# Altium PCB I2C-Sensor-PCB.pcbdoc
Units mil, origin at the board's own origin, x right, y up, seen from the top; angles counter-clockwise.
Board outline 1140 x 940 mil, 2 copper layers (Top Layer, Bottom Layer), stack 62.2 mil thick; 10 components, 5 nets, 29 pads, 6 vias.
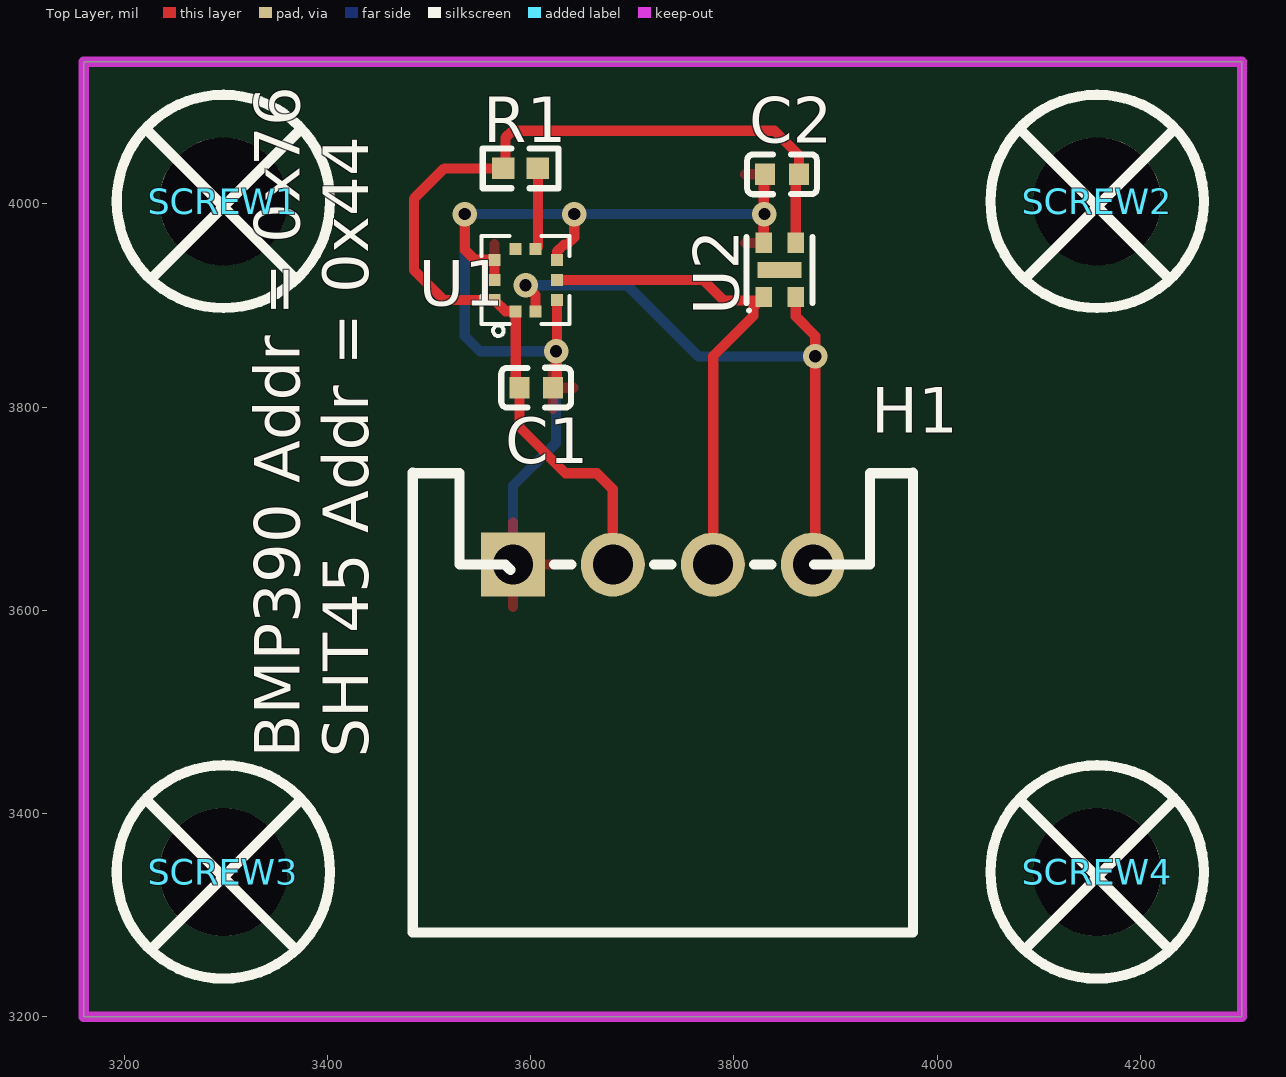
[diagram p0: Top Layer view]
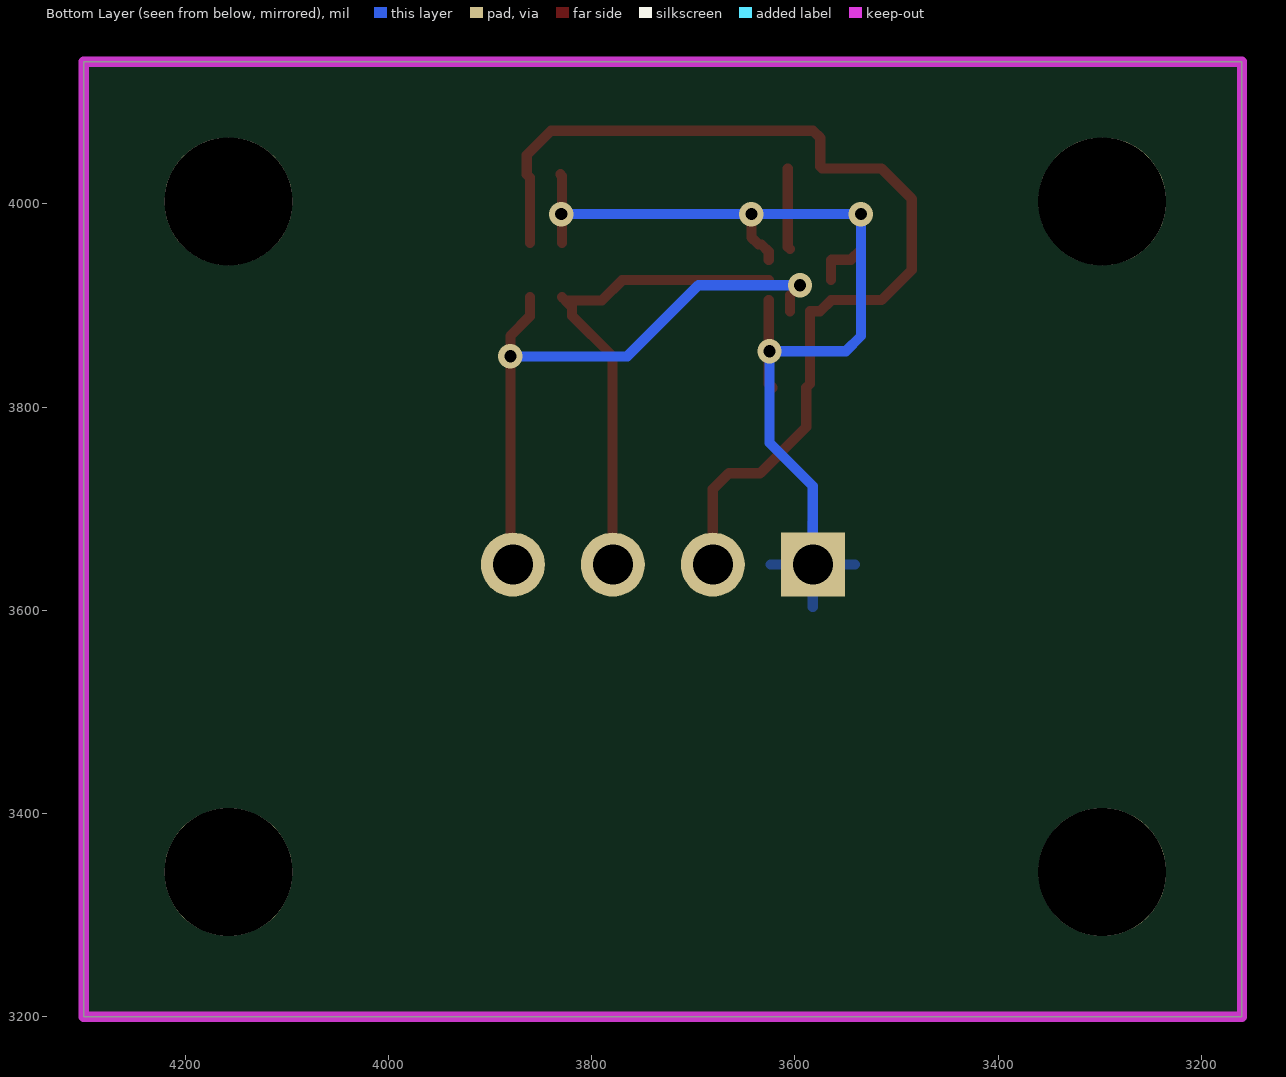
[diagram p1: Bottom Layer view, seen from below]

## Layer stack, top to bottom
Top Solder Mask Layer: solder mask 0.4, Dk 3.3
Top Layer: signal copper 1.4
Dielectric1: surface 59.4, FR4, Dk 4.5
Bottom Layer: signal copper 1.4
Bottom Solder Mask Layer: solder mask 0.4, Dk 3.3

## Board outline
3160,4140 3160,3200 4300,3200 4300,4140

## Design rules (kind name [scope] priority, off if disabled: settings)
BoardOutlineClearance copperThickness1oz [All] p0: genericclearance=10 ignorepadtopadclearanceinfootprint=FALSE except(0: Arc-SplitContinuation Track-SplitContinuation SMDPad-SplitContinuation THPad-SplitContinuation Via-SplitContinuation Fill-SplitContinuation Poly-SplitContinuation Region-SplitContinuation Text-SplitContinuation)
BoardOutlineClearance copperThickness2oz [All] p0: genericclearance=10 ignorepadtopadclearanceinfootprint=FALSE except(0: Arc-SplitContinuation Track-SplitContinuation SMDPad-SplitContinuation THPad-SplitContinuation Via-SplitContinuation Fill-SplitContinuation Poly-SplitContinuation Region-SplitContinuation Text-SplitContinuation)
BoardOutlineClearance Plane_innerPlane [All] p0: genericclearance=10 ignorepadtopadclearanceinfootprint=FALSE except(0: Arc-SplitContinuation Track-SplitContinuation SMDPad-SplitContinuation THPad-SplitContinuation Via-SplitContinuation Fill-SplitContinuation Poly-SplitContinuation Region-SplitContinuation Text-SplitContinuation)
BoardOutlineClearance Copper_copperRegion [All] p0: genericclearance=10 ignorepadtopadclearanceinfootprint=FALSE except(0: Arc-SplitContinuation Track-SplitContinuation SMDPad-SplitContinuation THPad-SplitContinuation Via-SplitContinuation Fill-SplitContinuation Poly-SplitContinuation Region-SplitContinuation Text-SplitContinuation)
BoardOutlineClearance otherClearance [All] p0: genericclearance=10 ignorepadtopadclearanceinfootprint=FALSE except(0: Arc-SplitContinuation Track-SplitContinuation SMDPad-SplitContinuation THPad-SplitContinuation Via-SplitContinuation Fill-SplitContinuation Poly-SplitContinuation Region-SplitContinuation Text-SplitContinuation)
Clearance copperThickness1oz [All] p1: gap=7 ignorepadtopadclearanceinfootprint=FALSE
Clearance copperThickness2oz [All] p1: gap=7 ignorepadtopadclearanceinfootprint=FALSE
Clearance Plane_innerPlane [All] p1: gap=7 ignorepadtopadclearanceinfootprint=FALSE
Clearance Copper_copperRegion [All] p1: gap=7 ignorepadtopadclearanceinfootprint=FALSE
Clearance otherClearance [All] p1: gap=7 ignorepadtopadclearanceinfootprint=FALSE
DiffPairsRouting differentialPair [All] p1: maxuncoupledlength=10 minlimit=6 maxlimit=Infinity mostfreqgap=6 toplayer_minwidth=10 toplayer_prefwidth=10 toplayer_maxwidth=100 bottomlayer_minwidth=10 bottomlayer_prefwidth=10 bottomlayer_maxwidth=100
PasteMaskExpansion pasteMaskExpansion [All] p1: expansion=0
PlaneConnect innerPlane [All] p1: planeconnectstyle=Relief reliefexpansion=20 reliefentries=4 reliefconductorwidth=10 reliefairgap=10
PolygonConnect copperRegion [All] p1: connectstyle=Relief reliefentries=4 reliefconductorwidth=10 polygonreliefangle="90 Angle" airgapwidth=10
RoutingVias viaSize [All] p1: viastyle="Through Hole" holewidth=12.0078 minholewidth=11.811 maxholewidth=248.0314 width=12.0078 minwidth=11.811 maxwidth=248.0314
SolderMaskExpansion solderMaskExpansion [IsVia] p1: useseparateexpansions=TRUE expansion=-1000 expansionbottom=-1000
SolderMaskExpansion solderMaskExpansion [All] p2: useseparateexpansions=TRUE expansion=2 expansionbottom=2
Width copperThickness1oz [All] p1: maxlimit=100 minlimit=10 preferedwidth=10
Width copperThickness2oz [All] p1: maxlimit=100 minlimit=8 preferedwidth=10

## Components (designator, comment, footprint, x,y, rotation, side; value= is the part's Value field where it differs from the comment)
C1 "100nF" C0402#1 3605.4,3819.1 r0 top
C2 "100nF" C0402#2 3847.3,4029.2 r180 top
H1 "S4B-XH-A(LF)(SN)" CONN-TH_S4B-XH-A-LF-SN 3730,3645 r180 top
R1 "10kΩ" R0402 3590,4035 r180 top
SCREW1 "" Screw-Hole-M3 3300,4000 r0 top
SCREW2 "" Screw-Hole-M3 4160,4000 r0 top
SCREW3 "" Screw-Hole-M3 3300,3340 r0 top
SCREW4 "" Screw-Hole-M3 4160,3340 r0 top
U1 "BMP390" LGA-10_L2.0-W2.0-P0.50-BL 3595,3925 r0 top
U2 "SHT45-AD1F-R2" DFN-4_L1.5-W1.5-P0.8-TL-EP 3845,3935 r90 top

## Footprints (in the part's own frame and the unit in brackets; to place one, negate y for a bottom-side part, rotate by r counter-clockwise, add the part's x,y. Pads: shape width x height; smd on the part's side, far side on the other; paste and mask are expansions set on the pad)
C0402#1 [mil]
  rect 19.7x21.3 smd: 1(-16.5,0) 2(16.5,0)
  silkscreen extent -34,-20 34,20
C0402#2 [mil]
  rect 19.7x21.3 smd: 1(-16.6,0) 2(16.5,0)
  silkscreen extent -34,-20 34,20
CONN-TH_S4B-XH-A-LF-SN [mil]
  rect 63x63 hole 39.4: 1(147.6,0)
  round 63 hole 39.4: 2(49.2,0) 3(-49.2,0) 4(-147.6,0)
  silkscreen extent -246,-91 246,362
DFN-4_L1.5-W1.5-P0.8-TL-EP [mil]
  rect 19.9x16.5 smd: 1(-26.7,15.7) 2(-26.7,-15.8) 3(26.7,-15.8) 4(26.7,15.7)
  rect 15.7x43.3 smd: 5(0,0)
  silkscreen extent -41,-32 32,32
LGA-10_L2.0-W2.0-P0.50-BL [mil]
  rect 11.8x11.8 smd paste+0 mask+2: 1(-9.8,-30.7) 2(9.8,-30.7) 3(30.7,-19.7) 4(30.7,0) 5(30.7,19.7) 6(9.8,30.7) 7(-9.8,30.7) 8(-30.7,19.7) 9(-30.7,0) 10(-30.7,-19.7)
  silkscreen extent -43,-55 43,43
R0402 [mil]
  rect 22.3x21.3 smd paste-3937 mask+2: 1(-17,0) 2(17,0)
  silkscreen extent -37,-20 37,20
Screw-Hole-M3 [mil]
  round 126 hole 126 paste+0 mask+4: 1(-2.5,2.5)
  silkscreen extent -108,-102 102,108

## Via types
v1: diameter 24, hole 12, Top Layer to Bottom Layer, 6 vias

## Nets (pads, with @x,y where several pads share a name; then routed paths per layer and width w, separated by ;. In a path a pad name is that pad's centre, name@x,y a point inside that pad or via, vN(x,y) a via of type N, cw(c..) or ccw(c..) an arc to the next point about the centre after c; other vN are vias at no path point)
$1N570: R1.1 U1.6 | length 80.2
  Top Layer w10: U1.6 3607,3957.9 R1.1
GND: C1.2 C2.2 H1.1 U1.3 U1.5 U1.8 U1.9 U2.4 | length 1037.1
  Top Layer w10: v1(3535,3990) 3535,3955 3545,3945 3564,3945 U1.8 U1.9 ; C1.2 3625.7,3822.9 U1.3 ; U1.5 3625.7,3952.9 3632.8,3960 3635.7,3960 3642.8,3967.1 v1(3642.8,3990) ; U2.4 3829.3,4027.6 C2.2
  Bottom Layer w10: H1.1 3582.4,3722.4 3625,3765 v1(3625,3855) 3550,3855 3535,3870 v1(3535,3990) v1(3642.8,3990) v1(3830,3990)
SCL: H1.4 U1.2 U2.2 | length 616
  Top Layer w10: v1(3595,3920) 3604.8,3910.2 U1.2 ; U2.2 3860.8,3889.3 3880,3870 v1(3880,3850) 3880,3647.4 H1.4
  Bottom Layer w10: v1(3595,3920) 3695,3920 3765,3850 v1(3880,3850)
SDA: H1.3 U1.4 U2.1 | length 493.4
  Top Layer w10: U1.4 3770,3925 3790,3905 U2.1@3825.9,3905 ; H1.3 3779.6,3644.6 3779.6,3850.4 3819.3,3890 3819.3,3898.3 U2.1@3825.9,3905 ; U2.1 U2.1@3825.9,3905
VCC: C1.1 C2.1 H1.2 R1.2 U1.1 U1.10 U2.3 | length 1015.5
  Top Layer w10: H1.2@3680.8,3644.2 3680.8,3719.2 3665,3735 3634.2,3735 3588.9,3780.4 C1.1 3585.2,3822.8 U1.1 3575.3,3894.3 U1.10 3514.7,3905.3 3485,3935 3485,4005 3515,4035 R1.2 3575,4037 3575,4065 3582.1,4072.1 3840,4072.1 3863.9,4048.2 C2.1 3860.8,4026 U2.3
pads on no net: SCREW1.1 SCREW2.1 SCREW3.1 SCREW4.1 U1.7 U2.5

## Polygon pours and split planes (outlines as drawn)
GND on Top Layer (solid, remove dead copper, pour order 0): 3060,4270 3060,3000 4495,3000 4495,4270
GND on Bottom Layer (solid, remove dead copper, pour order 2): 3000,4330 3000,3045 4445,3045 4445,4330

## Keep-outs
Board Outline Layer:
  the board outline again, w10

## Silkscreen, mask and mechanical layers (free items; w line width, h text height)
Top Silkscreen Layer:
  text "BMP390 Addr = 0x76 / SHT45 Addr = 0x44" at 3440,3455 h45 r90